# Altium PCB PCB1 (1).PcbDoc
Units mm, origin at the board's own origin, x right, y up, seen from the top; angles counter-clockwise.
Board outline 152.4 x 101.6 mm, 2 copper layers (Top Layer, Bottom Layer); 12 components, 23 nets, 78 pads, 4 vias.
Unrouted connection lines stored in the file: 10.
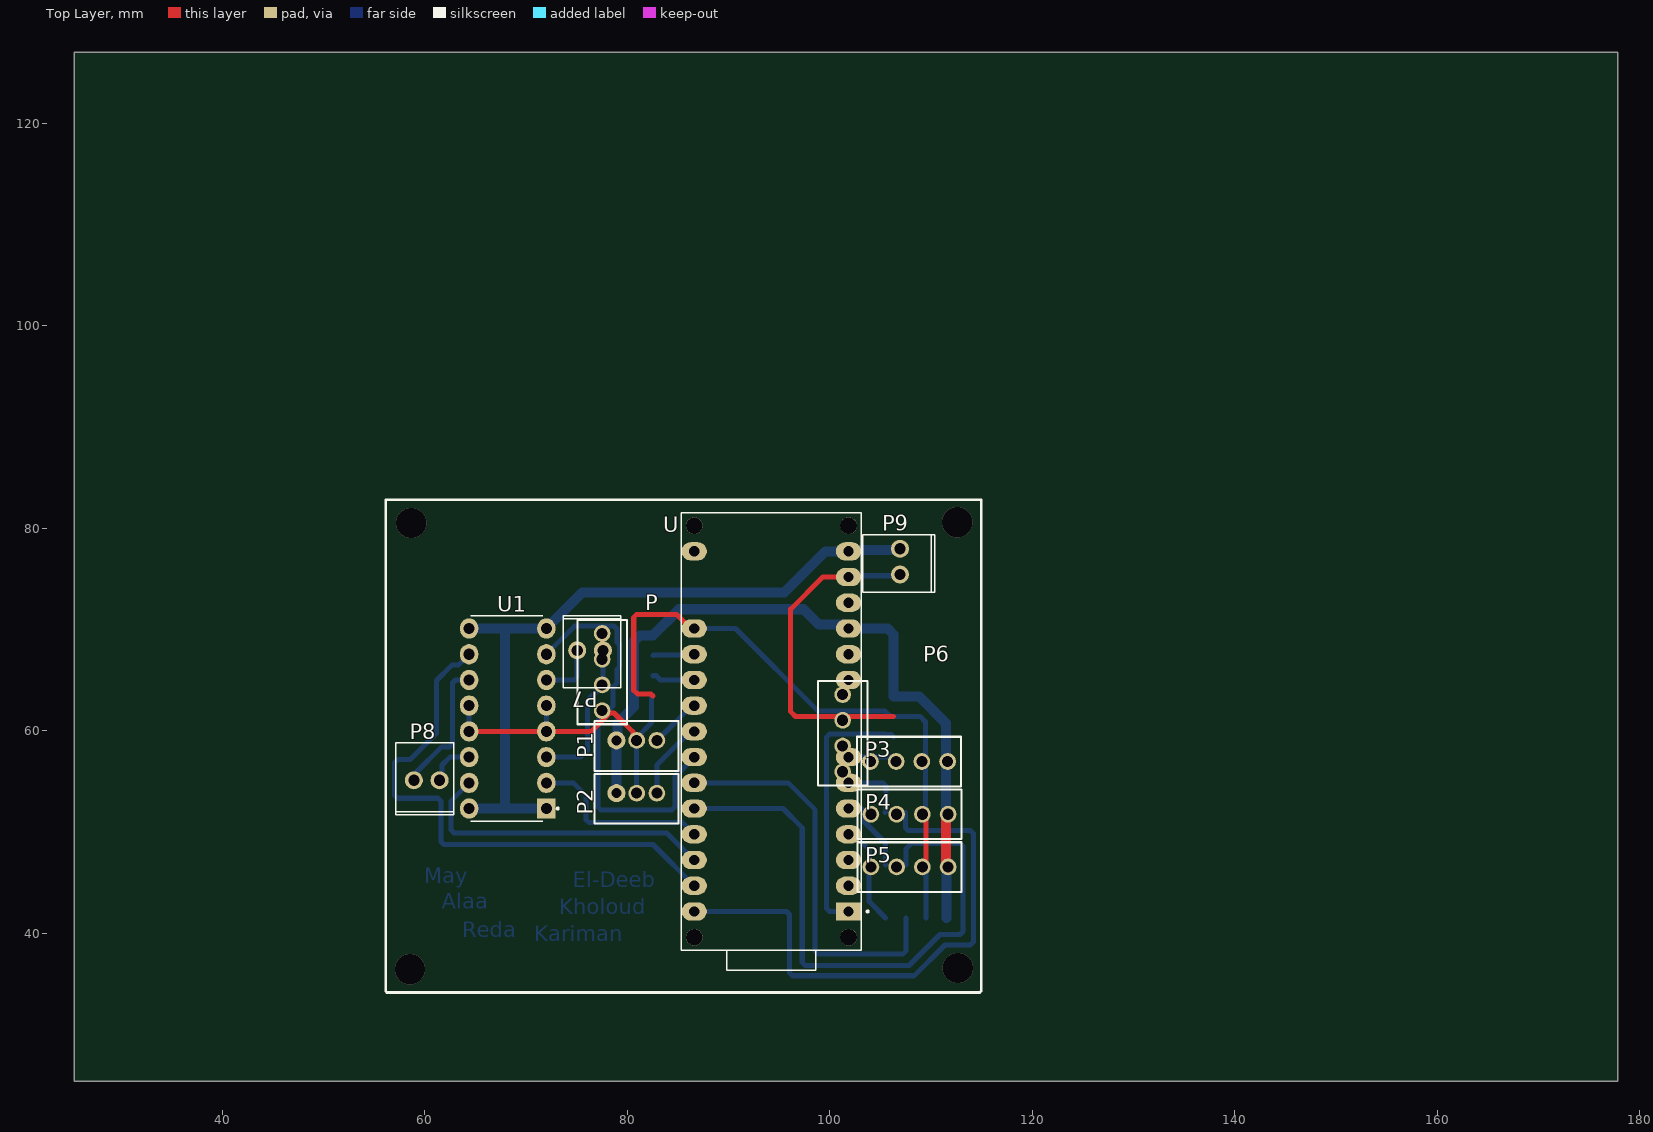
[diagram p0: Top Layer view]
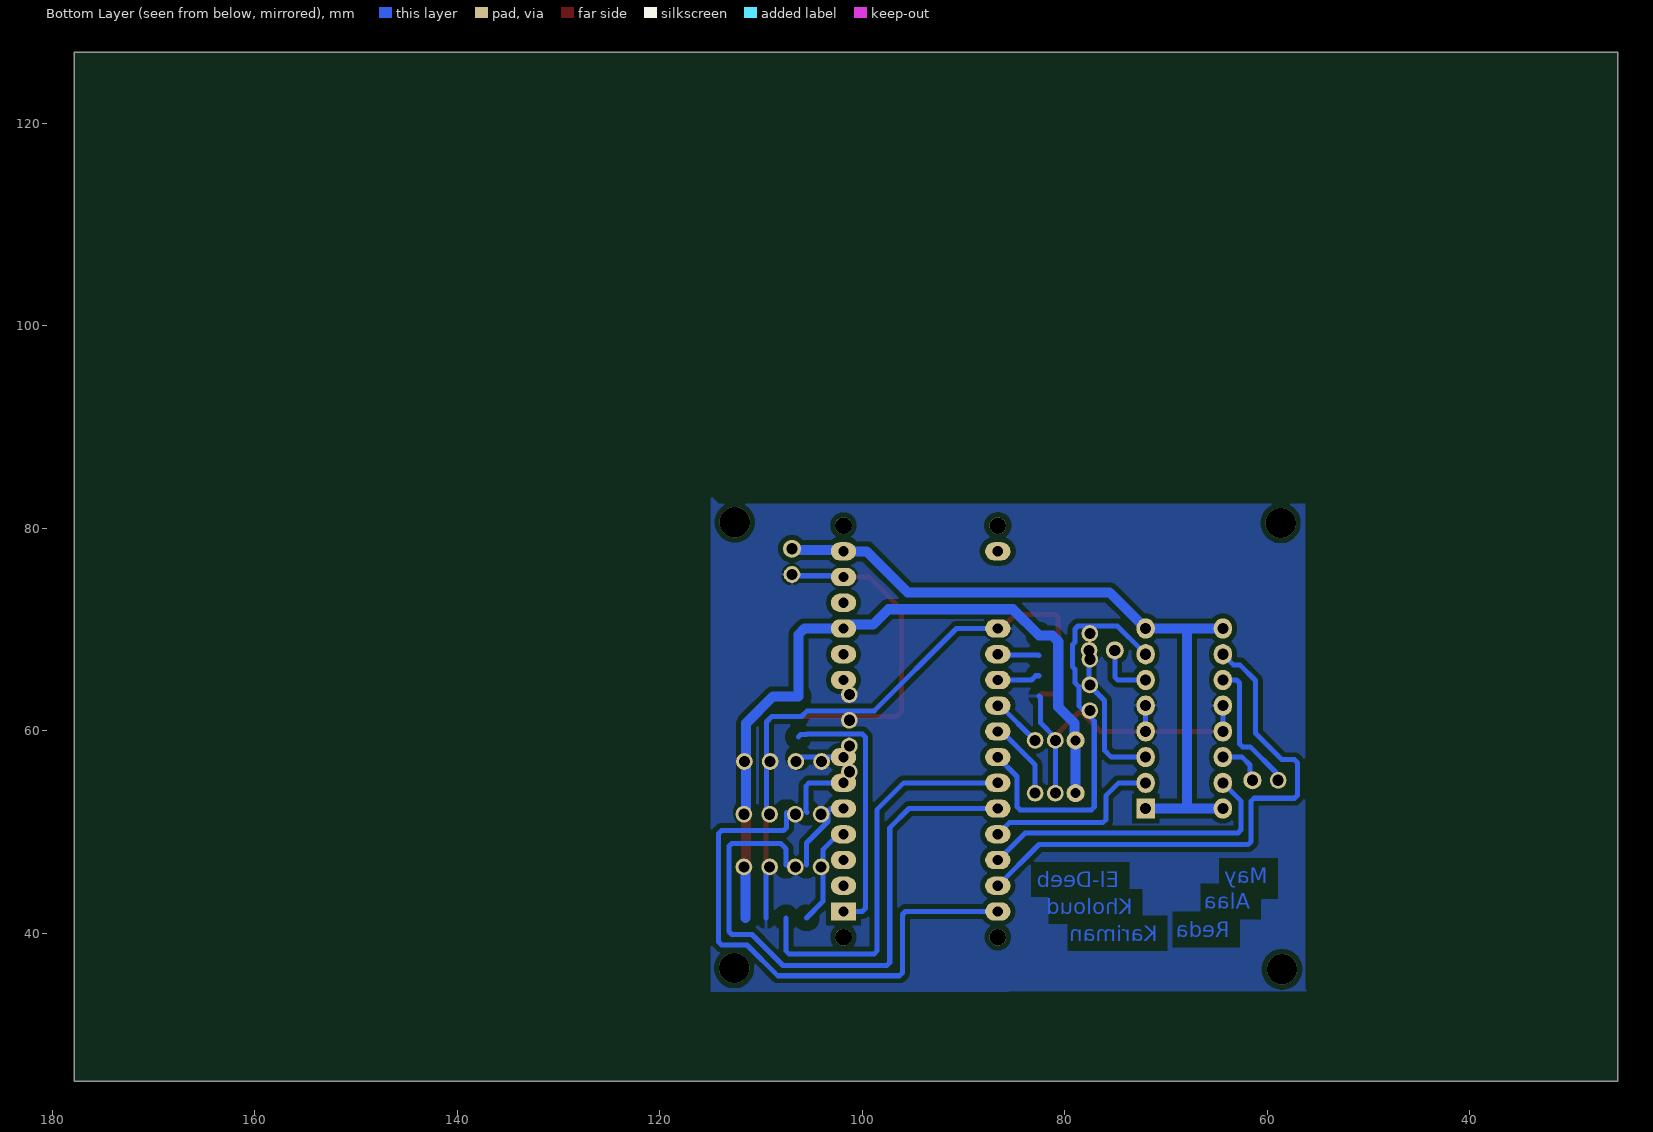
[diagram p1: Bottom Layer view, seen from below]
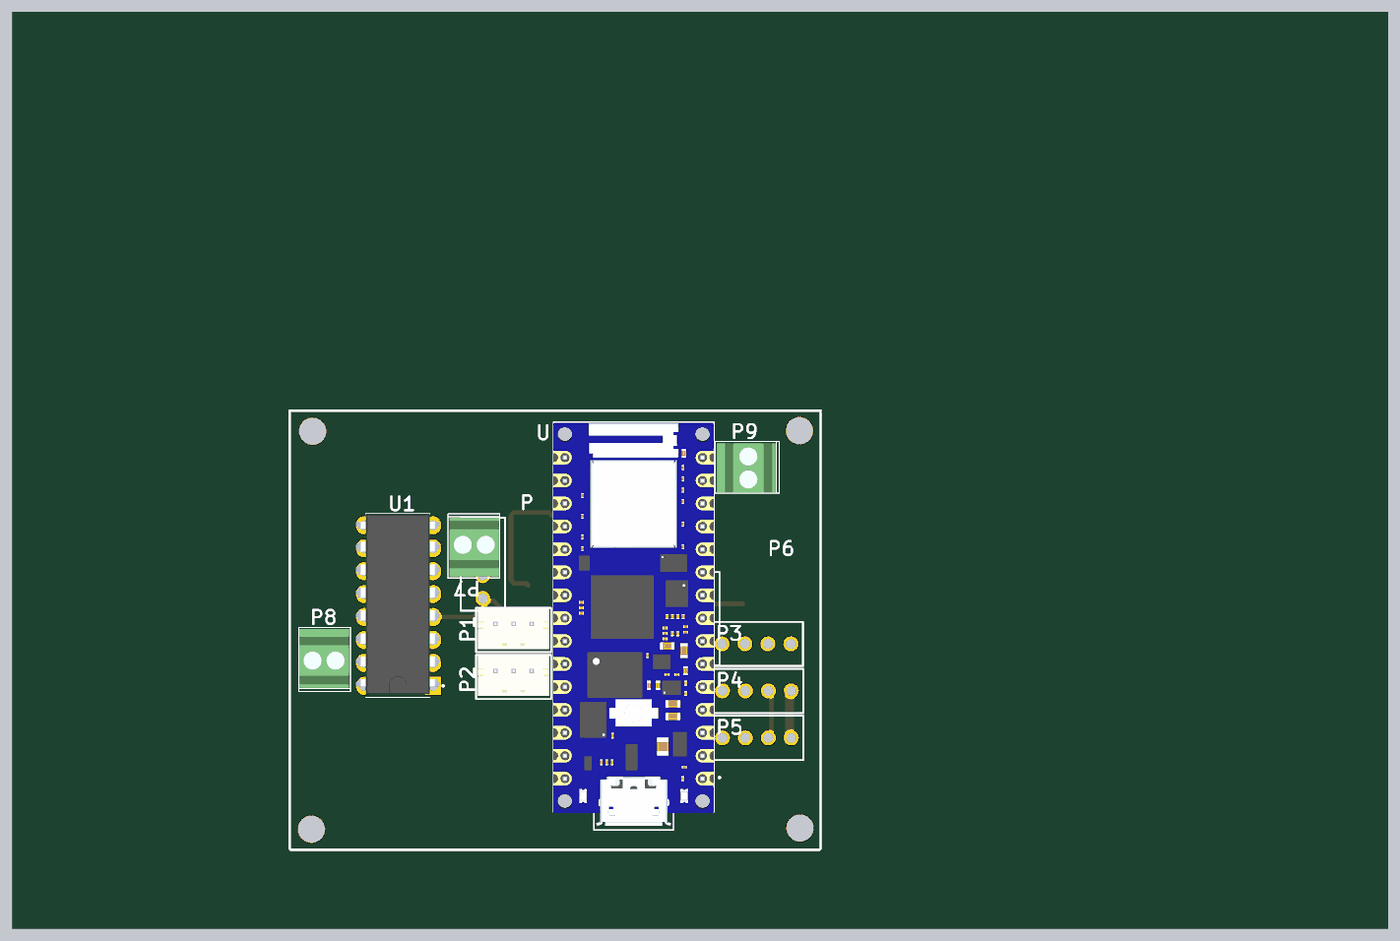
[diagram p2: 3D render of the assembled board from above, using the file's embedded part models]

## Layer stack, top to bottom
Top Solder: solder mask 0.0102, Solder Resist, Dk 3.5
Top Layer: signal copper 0.0356
Dielectric 1: dielectric 0.32, FR-4, Dk 4.8
Bottom Layer: signal copper 0.0356
Bottom Solder: solder mask 0.0102, Solder Resist, Dk 3.5

## Board outline
25.4,25.4 177.8,25.4 177.8,127 25.4,127

## Design rules (kind name [scope] priority, off if disabled: settings)
Clearance [All] p1: gap=0.5 ignorepadtopadclearanceinfootprint=TRUE
PolygonConnect [All] p1: connectstyle=Relief reliefconductorwidth=0.254 reliefentries=4 polygonreliefangle="90 Angle" airgapwidth=0.254
RoutingVias [All] p1: holewidth=0.711 width=1.27 viastyle="Through Hole" minholewidth=0.711 minwidth=1.27 maxholewidth=0.711 maxwidth=1.27
SolderMaskExpansion [All] p1: expansion=0.102 istentingtop=FALSE
Width [All] p1: maxlimit=1 minlimit=0.5 preferedwidth=0.7
30 further rules are at their usual default settings.

## Components (designator, comment, footprint, x,y, rotation, side; value= is the part's Value field where it differs from the comment)
P "Ultrasonic Sensor" "4PIN JST" 82.55,66.437 r270 top
P1 "Door IR" "3pin jst" 80.931,59.055 r0 top
P2 "Door IR" "3pin jst" 80.931,53.848 r0 top
P3 "4pin jst" "4PIN JST" 108.458,51.943 r180 top
P4 "4pin jst" "4PIN JST" 108.506,46.736 r180 top
P5 "4pin jst" "4PIN JST" 108.506,41.529 r180 top
P6 "4pin jst" "4PIN JST" 106.299,60.404 r270 top
P7 "2pin terminal block" "2pin terminal block" 75.057,67.945 r180 top
P8 "2pin terminal block" "2pin terminal block" 61.468,55.118 r0 top
P9 "2pin terminal block" "2pin terminal block" 106.934,77.978 r90 top
U "Arduino Nano" "ARDUINO NANO" 94.234,59.944 r90 top
U1 "L293D" L293D 67.609,61.214 r180 top

## Footprints (in the part's own frame and the unit in brackets; to place one, negate y for a bottom-side part, rotate by r counter-clockwise, add the part's x,y. Pads: shape width x height; smd on the part's side, far side on the other; paste and mask are expansions set on the pad)
"2pin terminal block" [mil]
  round 70 / inner round 64.96 / far side round 64.96 hole 43.31: 1(-100,0)
  round 70 hole 43.31: 2(0,0)
  silkscreen extent -170,-135 55,145, body extent -168,-118 48,138, height 338
"3pin jst" [mil]
  round 70 hole 39.37: 1(-78.74,0)
  round 65 hole 43.31: 2(0,0) 3(78.74,0)
  silkscreen extent -163,-118 163,75, body extent -156,-105 156,72, height 236
"4PIN JST" [mil]
  round 65 hole 43.31: 1(-125,-198) 2(-25,-198) 3(75,-198) 4(175,-198)
  silkscreen extent -178,-294 228,-101
"ARDUINO NANO" [mm]
  rect 1.8x2.5 hole 1.016: 1(-17.78,-7.62)
  oval 1.8x2.5 hole 1.016: 2(-15.24,-7.62) 3(-12.7,-7.62) 4(-10.16,-7.62) 5(-7.62,-7.62) 6(-5.08,-7.62) 7(-2.54,-7.62) 10(5.08,-7.62) 11(7.62,-7.62) 12(10.16,-7.62) 13(12.7,-7.62) 14(15.24,-7.62) 15(17.78,-7.62) 16(17.78,7.62) 19(10.16,7.62) 20(7.62,7.62) 21(5.08,7.62) 22(2.54,7.62) 23(0,7.62) 24(-2.54,7.62) 25(-5.08,7.62) 26(-7.62,7.62) 27(-10.16,7.62) 28(-12.7,7.62) 29(-15.24,7.62) 30(-17.78,7.62)
  round 1.65 hole 1.65 unplated: ""(-20.32,-7.62) ""(-20.32,7.62) ""(20.32,-7.62) ""(20.32,7.62)
  silkscreen extent -23.59,-9.6 21.59,8.88, body extent -23.11,-8.89 21.47,8.88, height 8.51
L293D [mm]
  rect 1.8x2 hole 1.1: 1(-4.4,8.89)
  oval 1.8x2 hole 1.1: 2(-4.4,6.35) 3(-4.4,3.81) 4(-4.4,1.27) 5(-4.4,-1.27) 6(-4.4,-3.81) 7(-4.4,-6.35) 8(-4.4,-8.89) 9(3.22,-8.89) 10(3.22,-6.35) 11(3.22,-3.81) 12(3.22,-1.27) 13(3.22,1.27) 14(3.22,3.81) 15(3.22,6.35) 16(3.22,8.89)
  silkscreen extent -5.63,-10.16 3.05,10.16, body extent -5.12,-10.16 4.12,9.84

## Part data
P: library part "4pin jst", "Connector Header Through Hole 4 position 0.079 (2.00mm)", Package=None, Availability="In Stock", Check_prices=https://www.snapeda.com/parts/B4B-PH-K/JST/view-part/?ref=eda, MF=JST, MP=B4B-PH-K, Price=None, Purchase-URL=https://pricing.snapeda.com/search/part/B4B-PH-K/?ref=eda, SnapEDA_Link=https://www.snapeda.com/parts/B4B-PH-K/JST/view-part/?ref=snap
P1 P2: library part "3pin jst", "Connector Header Through Hole 3 position 0.079 (2.00mm)", Package=None, Availability="In Stock", Check_prices=https://www.snapeda.com/parts/B3B-PH-K/JST/view-part/?ref=eda, MF=JST, MP=B3B-PH-K, Price=None, Purchase-URL=https://pricing.snapeda.com/search/part/B3B-PH-K/?ref=eda, SnapEDA_Link=https://www.snapeda.com/parts/B3B-PH-K/JST/view-part/?ref=snap
P3 P4 P5 P6: "Connector Header Through Hole 4 position 0.079 (2.00mm)", Package=None, Availability="In Stock", Check_prices=https://www.snapeda.com/parts/B4B-PH-K/JST/view-part/?ref=eda, MF=JST, MP=B4B-PH-K, Price=None, Purchase-URL=https://pricing.snapeda.com/search/part/B4B-PH-K/?ref=eda, SnapEDA_Link=https://www.snapeda.com/parts/B4B-PH-K/JST/view-part/?ref=snap
P7 P8 P9: "Connector Terminal Blocks Receptacle 2 Position 5.08mm Solder Straight Thru-Hole 13.5A/Contact", Package=None, Availability="In Stock", Check_prices=https://www.snapeda.com/parts/282837-2/TE+Connectivity+AMP+Connectors/view-part/?ref=eda, MF="TE Connectivity", MP=282837-2, Price=None, Purchase-URL=https://pricing.snapeda.com/search/part/282837-2/?ref=eda, SnapEDA_Link=https://www.snapeda.com/parts/282837-2/TE+Connectivity+AMP+Connectors/view-part/?ref=snap
U: "NINA-W102, RP2040 Arduino Nano RP2040 Connect with Headers series ARMÂ® CortexÂ®-M0+ MCU 32-Bit Embedded Evaluation Board", Package=None, Check_prices=https://www.snapeda.com/parts/ABX00053/Arduino/view-part/?ref=eda, Digi-Key_Part_Number=1050-ABX00053-ND, MF=Arduino, MP=ABX00053, Purchase-URL=https://pricing.snapeda.com/search/part/ABX00053/?ref=eda, SnapEDA_Link=https://www.snapeda.com/parts/ABX00053/Arduino/view-part/?ref=snap
U1: "Bipolar Motor Driver - Parallel 16-PowerDIP", Package="DIP-16 STMicroelectronics", Availability="In Stock", Check_prices=https://www.snapeda.com/parts/L293D/STMicroelectronics/view-part/?ref=eda, MF=STMicroelectronics, MP=L293D, Price=None, Purchase-URL=https://pricing.snapeda.com/search/part/L293D/?ref=eda, SnapEDA_Link=https://www.snapeda.com/parts/L293D/STMicroelectronics/view-part/?ref=snap

## Via types
v1: diameter 3, hole 3, Top Layer to Bottom Layer, 4 vias

## Nets (pads, with @x,y where several pads share a name; then routed paths per layer and width w, separated by ;. In a path a pad name is that pad's centre, name@x,y a point inside that pad or via, vN(x,y) a via of type N, cw(c..) or ccw(c..) an arc to the next point about the centre after c; other vN are vias at no path point)
+5V: P1.1 P2.1 P3.1 P4.1 P5.1 P6.1 P.1 U.12 | length 75.3
  Top Layer w1: P4.1@111.458,51.943 111.482,51.919 111.482,46.76 P5.1@111.506,46.736
  Bottom Layer w0.5: P1.1 P1.1@78.931,59.373 ; 82.531,69.418 82.55,69.437 ; U.12@101.094,70.483 101.198,70.483 101.577,70.104 U.12
  Bottom Layer w1: P2.1 P1.1 ; P1.1@78.931,59.373 78.997,59.373 79.038,59.414 79.038,60.75 80.645,62.357 80.645,68.832 81.231,69.418 82.531,69.418 ; 82.569,69.456 85.122,72.009 97.409,72.009 98.935,70.483 U.12@101.094,70.483 ; U.12 105.713,70.104 106.299,69.518 106.299,63.404 108.808,63.404 111.458,60.754 P4.1@111.458,51.943 ; 111.506,41.529 P5.1@111.506,46.736
A0: P5.4 U.4 | length 10.1
  Bottom Layer w0.5: U.4 102.362,49.784 103.886,48.26 103.886,43.149 105.506,41.529
A1: P4.4 U.5 | length 7.8
  Bottom Layer w0.5: U.5 103.085,52.324 103.378,52.031 103.378,51.054 105.506,48.926 105.506,46.736
A2: P3.4 U.6 | length 6.5
  Bottom Layer w0.5: U.6 105.244,54.864 105.537,54.571 105.537,52.022 105.458,51.943
A3: P6.4 U.7 | length 4.4
  Bottom Layer w0.5: U.7 106.299,57.404
D2: P.2 U.20 | length 4.1
  Bottom Layer w0.5: 82.55,67.437 82.614,67.501 86.55,67.501 U.20
D3: P.3 U.21 | length 4.2
  Bottom Layer w0.5: 82.55,65.437 82.861,65.437 83.274,65.024 U.21
D4: P1.3 U.22 | length 5.1
  Bottom Layer w0.5: P1.3 86.36,62.484 U.22
D5: P2.3 U.23 | length 7.8
  Bottom Layer w0.5: P2.3 82.931,56.642 85.854,59.565 85.958,59.565 86.337,59.944 U.23
D7: P5.3 U.25 | length 39.5
  Bottom Layer w0.5: U.25 95.885,54.864 98.552,52.197 98.552,38.242 98.845,37.949 107.213,37.949 107.506,38.242 107.506,41.529
D8: P4.3 U.26 | length 58.2
  Bottom Layer w0.5: U.26 95.377,52.324 97.282,50.419 97.282,37.123 97.575,36.83 107.823,36.83 109.347,38.354 110.871,39.878 112.864,39.878 113.157,40.171 113.157,48.602 112.864,48.895 108.077,48.895 107.506,48.324 107.506,46.736
D12: P3.3 U.30 | length 54.1
  Bottom Layer w0.5: U.30 95.719,42.164 96.012,41.871 96.012,36.107 96.305,35.814 108.331,35.814 111.379,38.862 113.88,38.862 114.173,39.155 114.173,49.872 113.88,50.165 107.751,50.165 107.458,50.458 107.458,51.943
D13: P6.3 U.1 | length 26.1
  Bottom Layer w0.5: U.1 99.988,42.164 99.695,42.457 99.695,59.397 99.988,59.69 105.431,59.69 105.496,59.624 106.079,59.624 106.299,59.404
GND: P1.2 P2.2 P3.2 P4.2 P5.2 P6.2 P9.1 P.4 U1.4 U1.5 U1.12 U1.13 U.14 U.19 | length 128.8
  Top Layer w0.5: U1.13 U1.4 76.454,59.944 78.279,61.769 78.693,61.769 80.555,59.907 80.555,59.743 80.931,59.366 P1.2 ; 82.55,63.437 82.33,63.657 80.996,63.657 80.645,64.008 80.645,71.208 80.938,71.501 84.867,71.501 86.264,70.104 U.19 ; U.14 99.314,75.184 96.139,72.009 96.139,61.888 96.623,61.404 106.299,61.404 ; P4.2@109.458,51.943 109.482,51.919 109.482,46.76 P5.2@109.506,46.736
  Bottom Layer w0.5: U1.13 U1.12 ; U1.4 U1.5 ; P2.2 P1.2 80.931,59.315 82.405,60.789 82.405,63.292 82.55,63.437 ; U.19 90.678,70.104 98.806,61.976 105.431,61.976 106.003,61.404 106.299,61.404 108.927,61.404 109.458,60.873 P4.2@109.458,51.943 ; U.14 101.981,75.311 106.807,75.311 P9.1 ; 109.506,41.529 P5.2@109.506,46.736
M11: P7.1 U1.3 | length 14.7
  Bottom Layer w0.5: U1.3@72.39,57.404 75.399,57.404 76.073,58.078 76.073,62.992 77.597,64.516 P7.1@77.597,68.199
M11A: U1.2 U.27 | length 17.7
  Bottom Layer w0.5: U1.2@72.39,54.864 74.676,54.864 75.946,53.594 75.946,51.22 76.239,50.927 85.471,50.927 U.27
M12: P7.2 U1.6 | length 5.7
  Bottom Layer w0.5: U1.6@72.39,65.024 74.764,65.024 75.057,65.317 P7.2@75.057,68.199
M12A: U1.7 U.24 | length 40.6
  Bottom Layer w0.5: U1.7@72.635,67.809 72.39,67.564 72.39,67.945 74.803,70.358 78.701,70.358 78.994,70.065 78.994,68.736 79.248,68.482 79.248,66.333 78.994,66.079 78.994,64.75 78.608,64.364 78.608,62.464 77.089,60.945 77.089,52.49 77.382,52.197 84.416,52.197 84.709,52.49 84.709,55.499 U.24
M21: P8.1 U1.11 | length 13.4
  Bottom Layer w0.5: P8.1@58.937,55.127 59.148,55.338 59.148,55.875 61.693,58.42 62.445,58.42 62.738,58.713 62.738,64.731 63.031,65.024 U1.11
M21A: U1.10 U.29 | length 53.7
  Bottom Layer w0.5: U1.10 63.312,66.487 62.677,66.487 61.158,64.968 61.158,59.761 58.547,57.15 57.316,57.15 57.023,56.857 57.023,53.633 57.316,53.34 61.302,53.34 61.595,53.047 61.595,49.061 61.888,48.768 82.55,48.768 U.29
M22: P8.2 U1.14 | length 4.6
  Bottom Layer w0.5: P8.2 61.713,55.363 61.713,56.633 62.484,57.404 U1.14
M22A: U1.15 U.28 | length 30.6
  Bottom Layer w0.5: U1.15 62.611,53.086 62.611,50.204 62.904,49.911 83.91,49.911 86.577,47.244 U.28
VCC: P9.2 U1.1 U1.8 U1.9 U1.16 U.15 | length 71.1
  Bottom Layer w0.5: 67.818,70.104 67.945,69.977 ; U.15 U.15@101.981,77.851 ; P9.2@106.807,77.851 P9.2
  Bottom Layer w1: U1.16 67.945,52.324 ; U1.9 67.818,70.104 ; 67.945,69.977 67.945,52.324 ; 67.945,70.104 U1.8 75.565,73.66 95.504,73.66 99.568,77.724 U.15 ; U1.1 67.945,52.324 ; U.15@101.981,77.851 P9.2@106.807,77.851
pads on no net: U. U.2 U.3 U.10 U.11 U.13 U.16
copper on no net: | length 0.5
  Bottom Layer w0.254: v1(58.547,36.449) v1@58.674,36.576 ; v1@58.547,80.391 v1(58.674,80.518) ; v1@112.522,80.518 v1(112.585,80.581) ; v1@112.585,36.639 v1(112.649,36.576)

## Polygon pours and split planes (outlines as drawn)
GND on Bottom Layer "NONET_L-01_P-001" (solid, pour order 0): 56.007,34.29 56.261,34.544 56.261,82.423 114.173,82.423 114.935,83.185 114.935,34.163

## Other copper
Bottom Layer:
  text "May" at 59.971,44.942 h1.5
  text "El-Deeb" at 74.601,44.569 h1.5
  text "Alaa" at 61.667,42.41 h1.5
  text "Kholoud" at 73.274,41.902 h1.5
  text "Reda" at 63.726,39.616 h1.5
  text "Kariman" at 70.836,39.235 h1.5

## Silkscreen, mask and mechanical layers (free items; w line width, h text height)
Top Overlay:
  lines w0.254: 56.134,34.29 56.134,82.804 114.935,82.804 114.935,82.55 114.935,34.29 114.808,34.163 56.261,34.163 56.134,34.29

## Text inside footprints (layer, text, board x,y; h text height)
P: Mechanical 13 ">LABEL" at 78.105,71.39 h1.02 r270
P1: Mechanical 13 ">LABEL" at 76.994,54.61 h1.02
P2: Mechanical 13 ">LABEL" at 76.994,49.403 h1.02
P3: Mechanical 13 ">LABEL" at 113.411,56.388 h1.02 r180
P4: Mechanical 13 ">LABEL" at 113.459,51.181 h1.02 r180
P5: Mechanical 13 ">LABEL" at 113.459,45.974 h1.02 r180
P6: Mechanical 13 ">LABEL" at 101.854,65.357 h1.02 r270